# Altium PCB NASCO RAILTECB-112.PcbDoc
Units mil, origin at the board's own origin, x right, y up, seen from the top; angles counter-clockwise.
Board outline 3228.35 x 2519.69 mil, 2 copper layers (Top Layer, Bottom Layer); 4 components, 62 nets, 38 pads, 0 vias.
Unrouted connection lines stored in the file: 12.
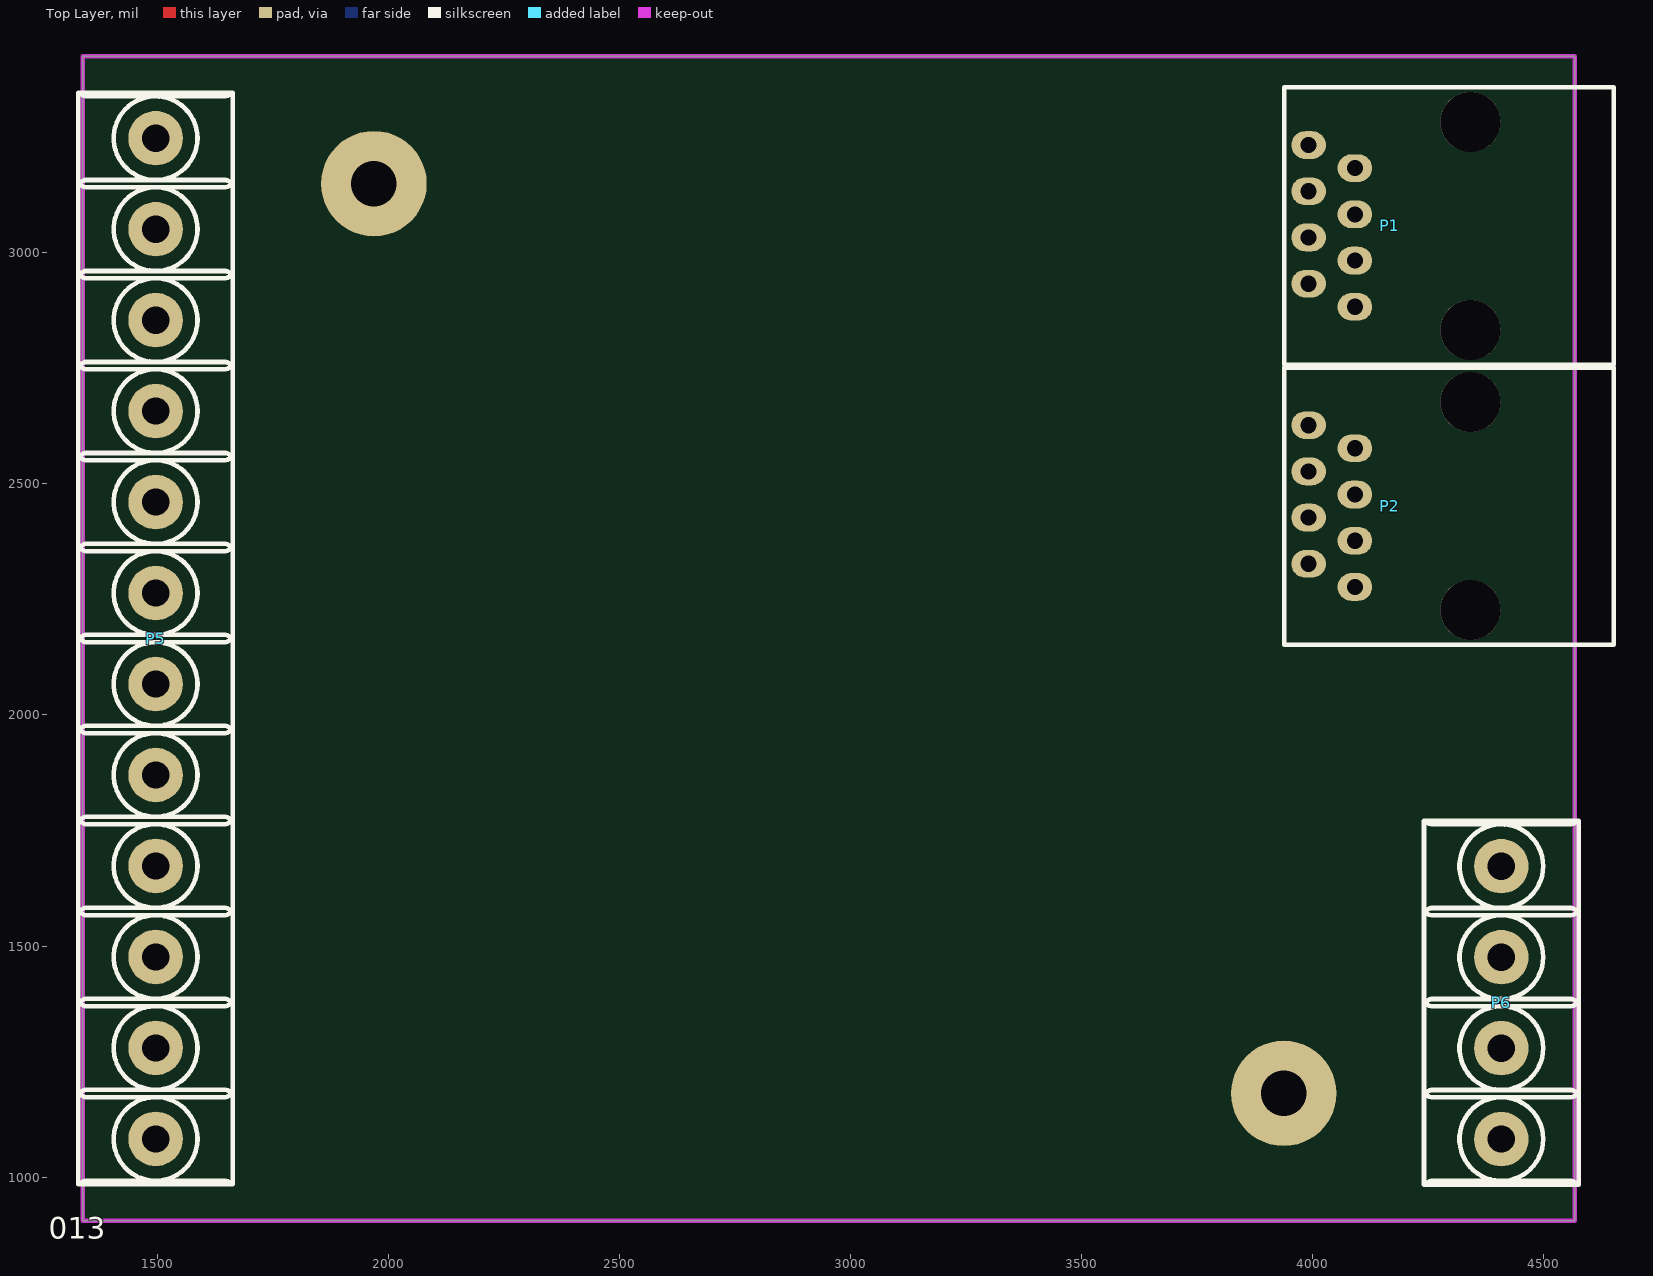
[diagram p0: Top Layer view]
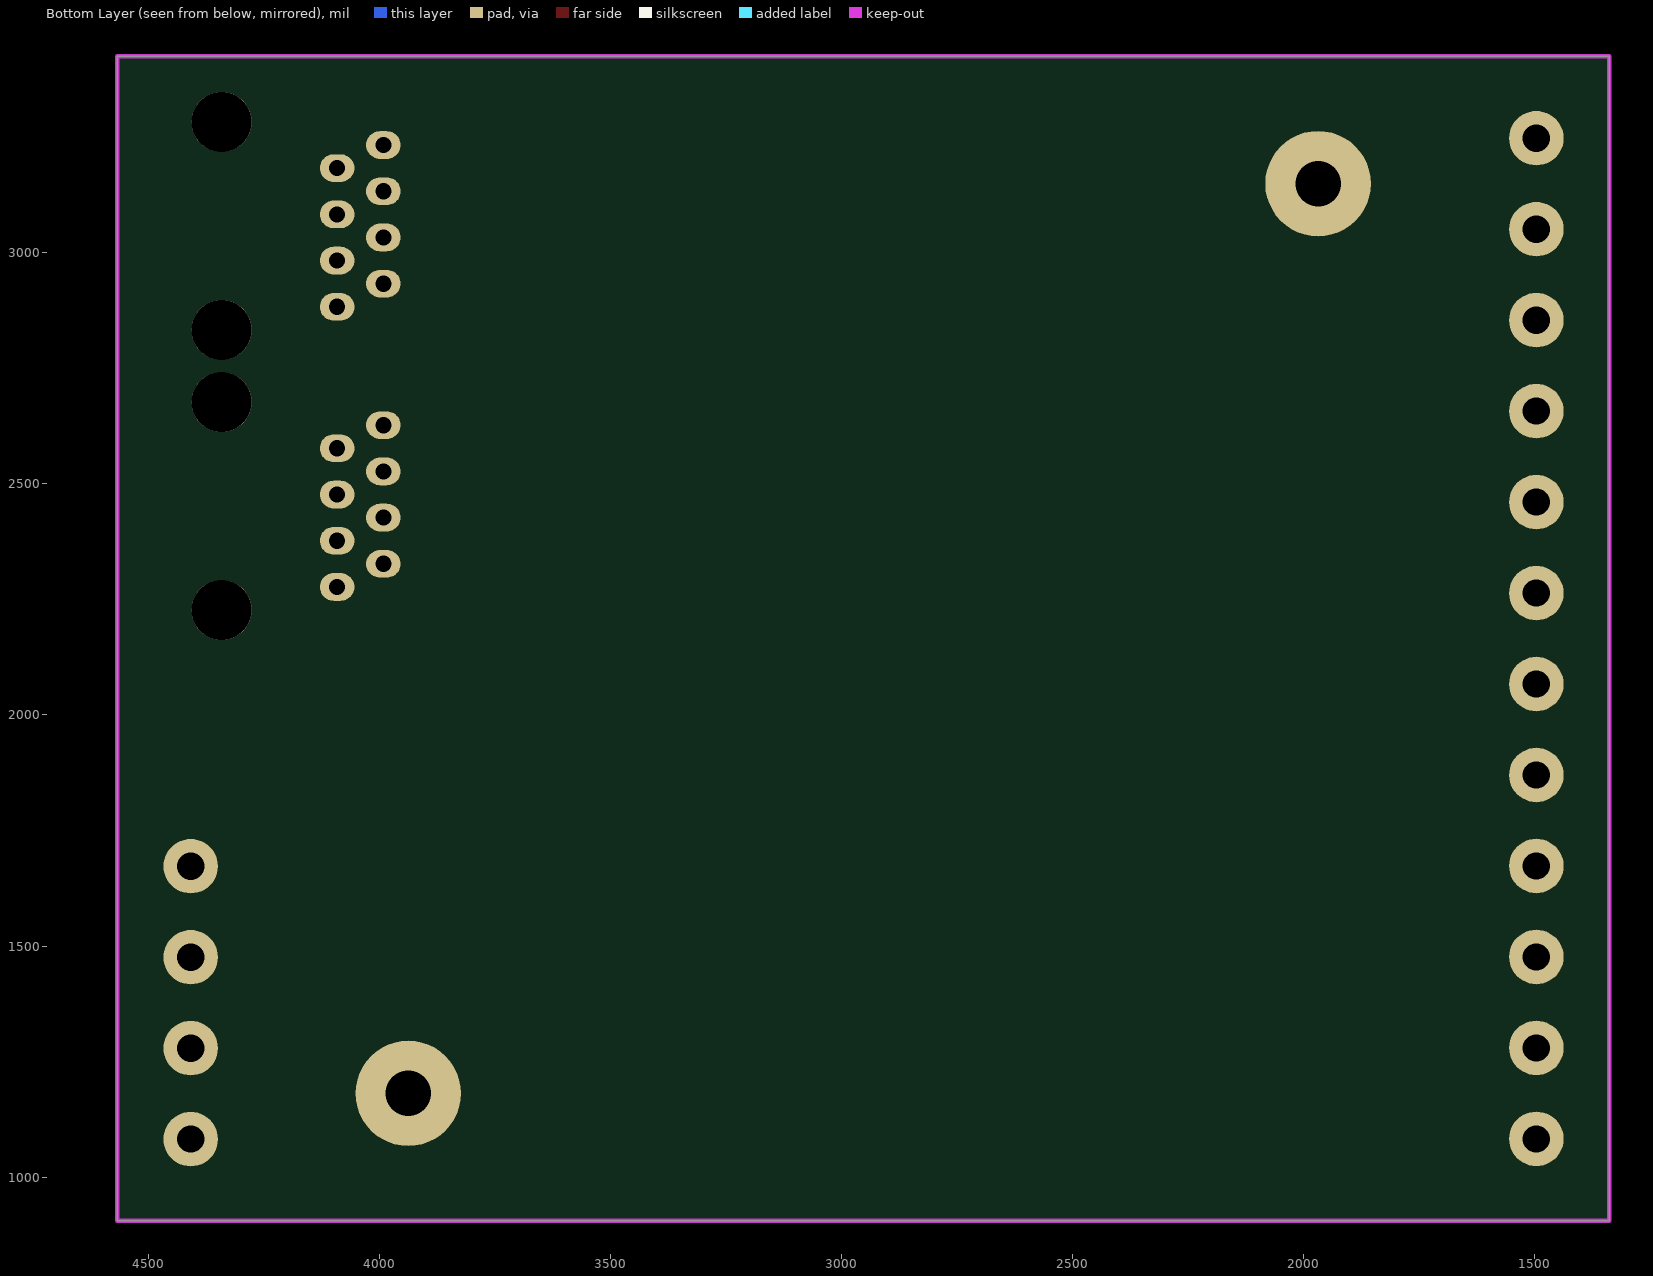
[diagram p1: Bottom Layer view, seen from below]

## Layer stack, top to bottom
Top Layer: signal copper 1.4
Dielectric: dielectric 12.6, FR-4, Dk 4.8
Bottom Layer: signal copper 1.4

## Board outline
1338.58,905.51 4566.93,905.51 4566.93,3425.2 1338.58,3425.2

## Design rules (kind name [scope] priority, off if disabled: settings)
Clearance Poly_GND [inPolygon vs not innet (gnd)] p1: gap=20
Clearance [All] p2: gap=8
HoleSize Testpoint [All] p2: absolutevalues=TRUE maxlimit=100 minlimit=1 maxpercent=80.000 minpercent=20.000
HoleSize TestPointUsage [All] p3: absolutevalues=TRUE maxlimit=100 minlimit=1 maxpercent=80.000 minpercent=20.000
PolygonConnect [All] p1: connectstyle=Relief reliefconductorwidth=10 reliefentries=4 polygonreliefangle="90 Angle"
RoutingVias [All] p1: holewidth=12 width=24 viastyle="Through Hole" minholewidth=12 minwidth=24 maxholewidth=28 maxwidth=50
SilkscreenOverComponentPads [All] p1: minsilkscreentomaskgap=10
SolderMaskExpansion [All] p1: expansion=4
Width Standard [All] p1: maxlimit=25 minlimit=8 preferedwidth=8
Width Power [inNet('VIN')] p2: maxlimit=100 minlimit=8 preferedwidth=25
27 further rules are at their usual default settings.

## Classes and differential pairs
net class INBUS[1..16]: INBUS1 INBUS2 INBUS3 INBUS4 INBUS5 INBUS6 INBUS7 INBUS8 INBUS9 INBUS10 INBUS11 INBUS12 INBUS13 INBUS14 INBUS15 INBUS16
component class U_Microprocessor: ICSP1 Y1
net class IPBUS[1..16]: IPBUS1 IPBUS2 IPBUS3 IPBUS4 IPBUS5 IPBUS6 IPBUS7 IPBUS8 IPBUS9 IPBUS10 IPBUS11 IPBUS12 IPBUS13 IPBUS14 IPBUS15 IPBUS16
channel class "INPUT CHANNEL": U_INPUTCHANNEL1 U_INPUTCHANNEL2 U_INPUTCHANNEL3 U_INPUTCHANNEL4 U_INPUTCHANNEL5 U_INPUTCHANNEL6 U_INPUTCHANNEL7 U_INPUTCHANNEL8 U_INPUTCHANNEL9 U_INPUTCHANNEL10 U_INPUTCHANNEL11 U_INPUTCHANNEL12 U_INPUTCHANNEL13 U_INPUTCHANNEL14 U_INPUTCHANNEL15 U_INPUTCHANNEL16
component class "nasco can input": P6
component class "U_can driver": U?

## Components (designator, comment, footprint, x,y, rotation, side; value= is the part's Value field where it differs from the comment)
P1 "COMSIN" "RJ45 RA (MOLEX 955012881)" 3990.89,3233.13 r270 top (schematic designator P3)
P2 "COMSOUT" "RJ45 RA (MOLEX 955012881)" 3990.89,2627 r270 top (schematic designator P5)
P5 "Header 12" BB66012111 1496.06,2165.35 r90 top (schematic designator P2)
P6 "Header 4" BB6604111 4407.78,1377.6 r90 top (schematic designator P1)

## Footprints (in the part's own frame and the unit in brackets; to place one, negate y for a bottom-side part, rotate by r counter-clockwise, add the part's x,y. Pads: shape width x height; smd on the part's side, far side on the other; paste and mask are expansions set on the pad)
BB6604111 [mm] "RAILTEC B 4 WAY"
  round 3 hole 1.5: 1(-7.5,0) 2(-2.5,0) 3(2.5,0) 4(7.5,0)
  silkscreen extent -10,-4.25 10,4.25, body extent -10,-4.25 10.02,4.25, height 15.5
BB66012111 [mm] "RAILTEC B 12 WAY"
  round 3 hole 1.5: 1(-27.5,0) 2(-22.5,0) 3(-17.5,0) 4(-12.5,0) 5(-7.5,0) 6(-2.5,0) 7(2.5,0) 8(7.5,0) 9(12.5,0) 10(17.5,0) 11(22.5,0) 12(27.5,0)
  silkscreen extent -30,-4.25 30,4.25, body extent -30,-4.25 30.02,4.25, height 15.5
"RJ45 RA (MOLEX 955012881)" [mil] "RJ45 MOLEX 955012881"
  round 130 hole 130 unplated: 0(-50,350) 0(400,350)
  oval 60x75 hole 35: 1(350,100) 2(300,0) 3(250,100) 4(200,0) 5(150,100) 6(100,0) 7(50,100) 8(0,0)
  silkscreen extent -125,-52 475,660, body extent -125,-52 475,660, height 453

## Part data
P1 P2: library part "Header 8", "Header, 8-Pin"
P5: "Header, 12-Pin"
P6: "Header, 4-Pin"

## Free pads (board coordinates)
  round 228.35 hole 98.43: 0(1968.5,3149.61) 0(3937.01,1181.1)

## Nets (pads, with @x,y where several pads share a name; then routed paths per layer and width w, separated by ;. In a path a pad name is that pad's centre, name@x,y a point inside that pad or via, vN(x,y) a via of type N, cw(c..) or ccw(c..) an arc to the next point about the centre after c; other vN are vias at no path point)
12V: 
B1: 
CAN_RX: 
CAN_TX: 
CANH: P1.1 P1.7 P2.1 P2.7
CANL: P1.2 P1.8 P2.2 P2.8
CTS#: 
G1: 
GND: P1.3 P1.6 P2.3 P2.6
ICSP_PGCLCK: 
ICSP_PGDATA: 
ICSP_VPP: 
INBUS1: P5.1
INBUS2: P5.2
INBUS3: P5.3
INBUS4: P5.4
INBUS5: P5.5
INBUS6: P5.6
INBUS7: P5.7
INBUS8: P5.8
INBUS9: P5.9
INBUS10: P5.10
INBUS11: P5.11
INBUS12: P5.12
INBUS13: P6.4
INBUS14: P6.3
INBUS15: P6.2
INBUS16: P6.1
IPBUS1: 
IPBUS2: 
IPBUS3: 
IPBUS4: 
IPBUS5: 
IPBUS6: 
IPBUS7: 
IPBUS8: 
IPBUS9: 
IPBUS10: 
IPBUS11: 
IPBUS12: 
IPBUS13: 
IPBUS14: 
IPBUS15: 
IPBUS16: 
NetC11_1: 
NetC14_1: 
NetD2_1: 
NetD14_2: 
NetP3_2: 
NetR9_2: 
NetR21_1: 
NetR24_1: 
NetR25_1: 
OSC1: 
OSC2: 
R1: 
RTS#: 
SUPPLY_SAMPLE: 
TTL_RX: 
TTL_TX: 
VCC: 
VIN: P1.4 P1.5 P2.4 P2.5
pads on no net: P1.0 P2.0

## Polygon pours and split planes (outlines as drawn)
GND on Bottom Layer "GND" (solid, remove dead copper, shelved, pour order 3): 1338.58,3425.2 4566.93,3425.2 4566.93,905.51 1338.58,905.51 1338.58,3425.2
GND on Top Layer "GND" (solid, remove dead copper, shelved, pour order 4): 1338.58,3425.2 4566.93,3425.2 4566.93,905.51 1338.58,905.51 1338.58,3425.2

## Keep-outs
Keep-Out Layer:
  the board outline again, w10

## Silkscreen, mask and mechanical layers (free items; w line width, h text height)
Top Overlay:
  text "⋮" at 850,1025 h450
  text "V001 January 2013" at 775,850 h80
Mechanical 1:
  the board outline again, w10
Mechanical 3:
  drawing of 166 lines, arcs and shapes, not listed